# Altium PCB ADCSHubV2.PcbDoc
Units mil, origin at the board's own origin, x right, y up, seen from the top; angles counter-clockwise.
Board outline 3625 x 3400 mil, 2 copper layers (Component Side, Bottom Layer), stack 65.756 mil thick; 36 components, 35 nets, 272 pads, 53 vias.
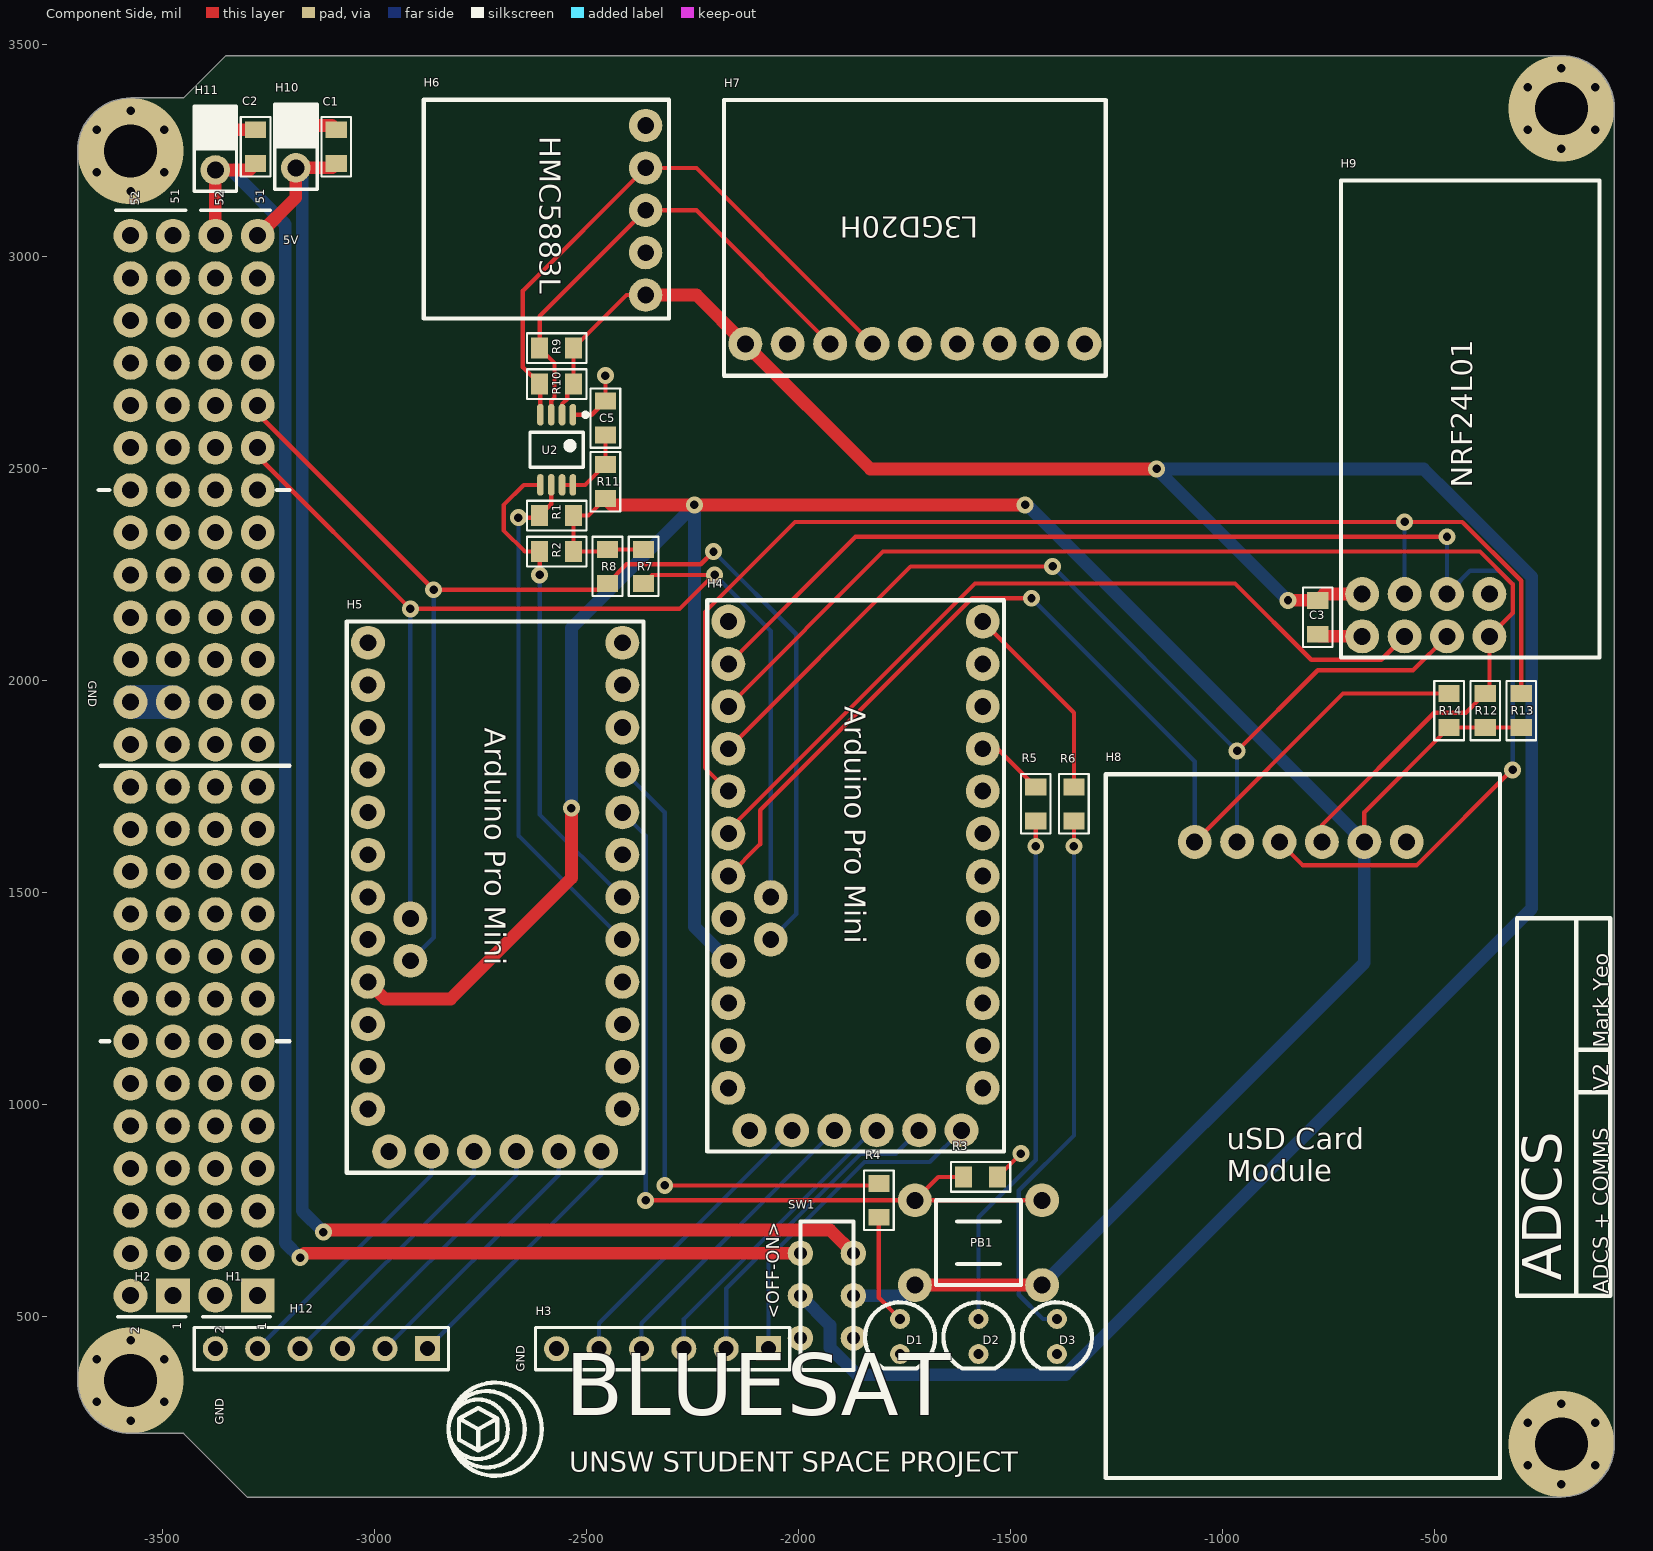
[diagram p0: Component Side view]
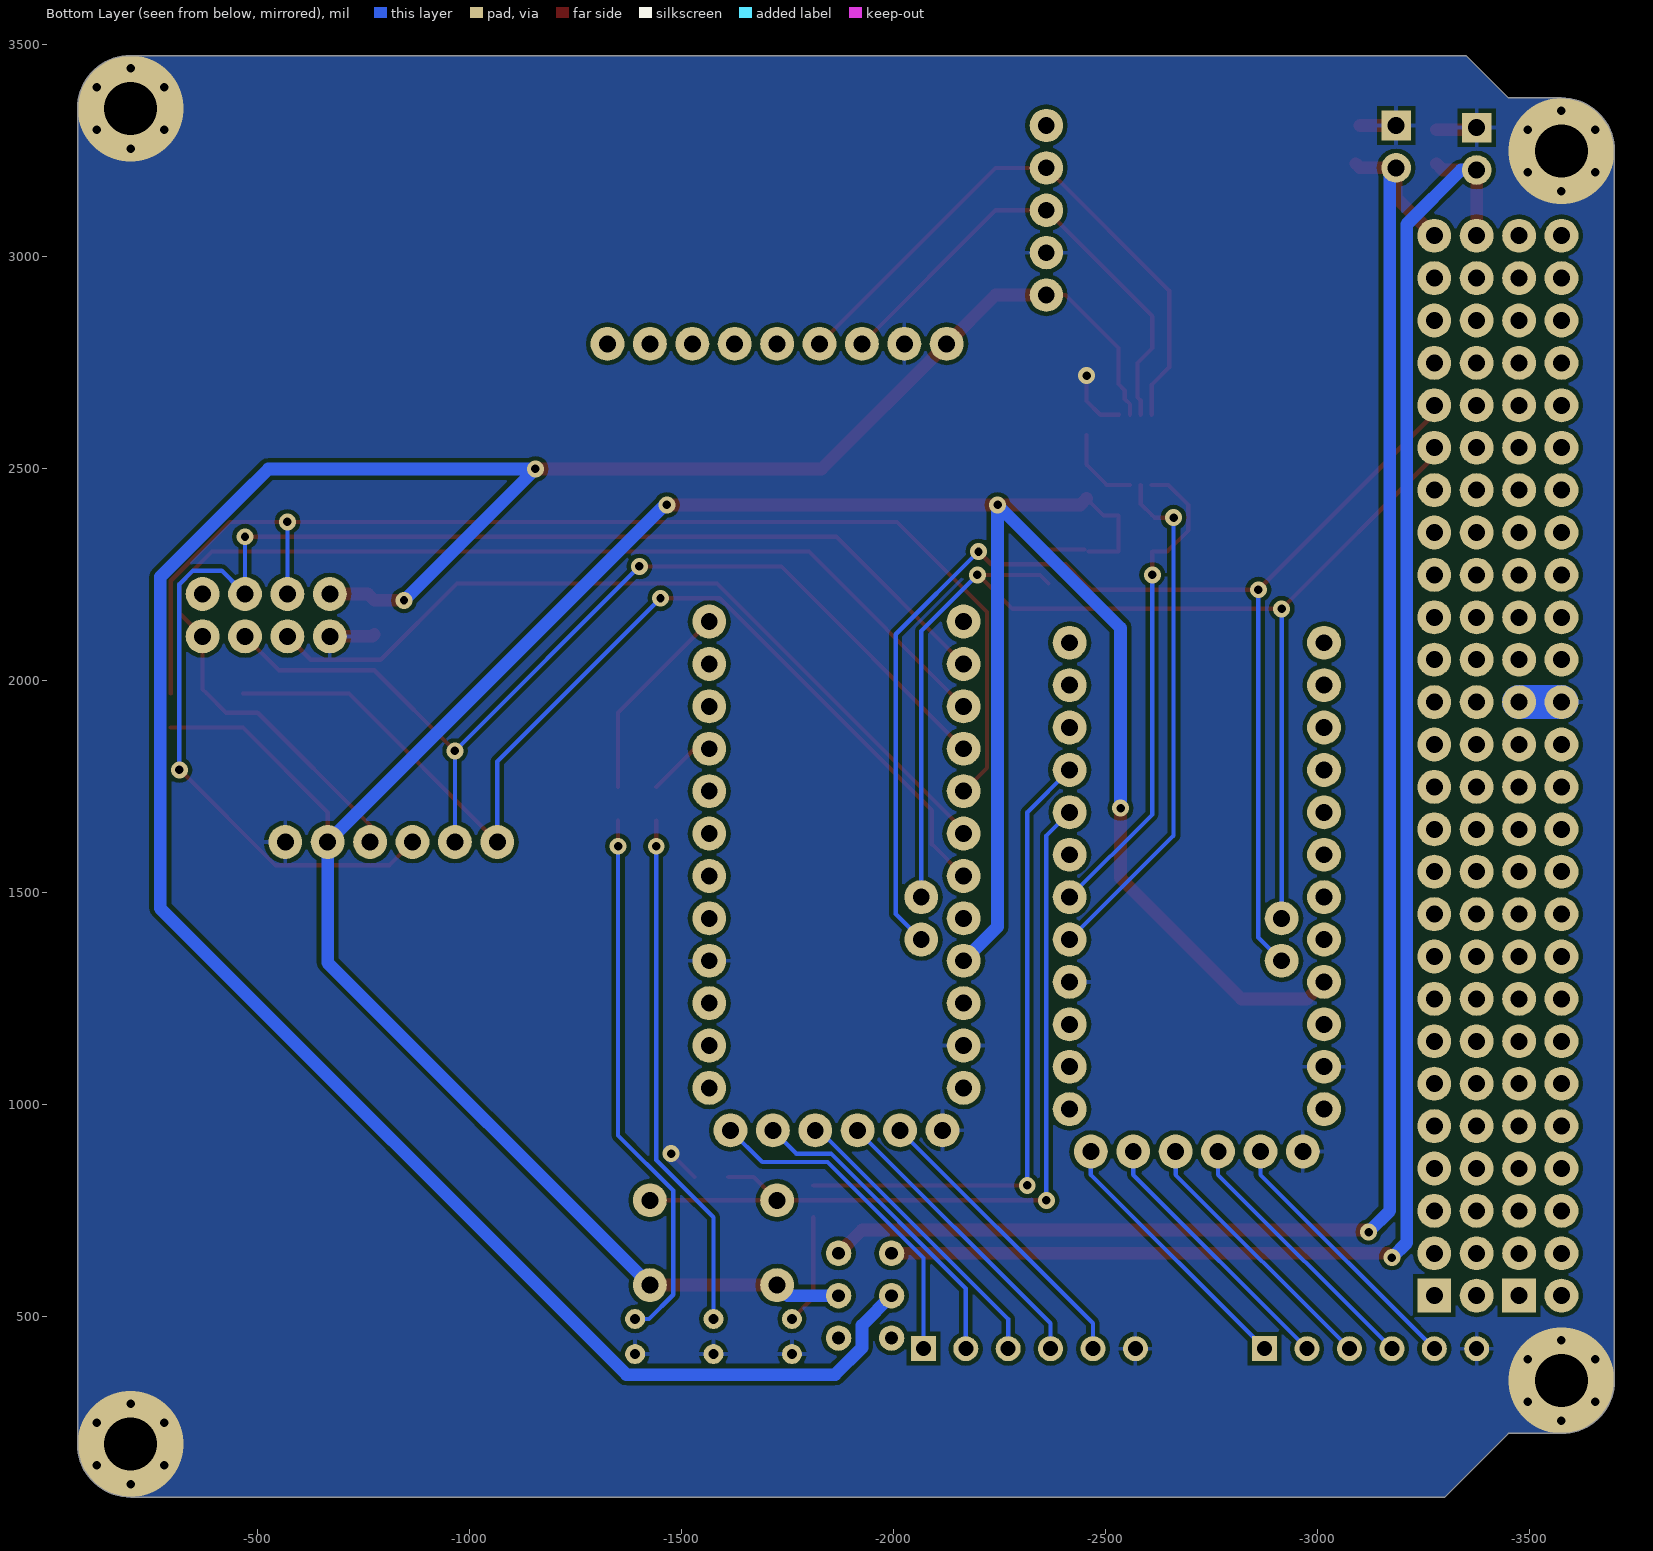
[diagram p1: Bottom Layer view, seen from below]

## Layer stack, top to bottom
Top Solder: solder mask 0.394, Solder Resist, Dk 3.5
Component Side: signal copper 1.378
Dielectric 1: core 63, FR-4, Dk 4.2
Bottom Layer: signal copper 1.378
Solder Side: solder mask 0.394, Solder Resist, Dk 3.5

## Board outline
-3575,225 cw(c-3575,350) -3700,350 -3700,3250 cw(c-3575,3250) -3575,3375 -3450,3375 -3350,3475 -200,3475 cw(c-200,3350) -75,3350 -75,200 cw(c-200,200) -200,75 -3300,75 -3450,225

## Design rules (kind name [scope] priority, off if disabled: settings)
Clearance [All] p1: gap=10
Clearance "Clearance (Same Net)" [All] p2: gap=0 except(8: SMDPad-SMDPad SMDPad-THPad SMDPad-Via)
ComponentClearance [All] p1: gap=0 collisioncheckmode=3 verticalgap=0 showdistances=FALSE
HoleSize HoleSize_1 [All] p1: absolutevalues=TRUE maxlimit=100000 minlimit=24 maxpercent=80.000 minpercent=20.000
HoleSize [All] p2: absolutevalues=TRUE maxlimit=100 minlimit=1 maxpercent=80.000 minpercent=20.000
HoleToHoleClearance mdViaViaSameLayer [All] p1: gap=8 allowstackedmicrovias=TRUE
HoleToHoleClearance [All] p2: gap=10 allowstackedmicrovias=TRUE
PasteMaskExpansion mlMinCreamFrame [All] p1: expansion=0
PasteMaskExpansion [All] p2: expansion=0
PlaneConnect PlaneConnect_1 [All] p1: planeconnectstyle=Relief reliefexpansion=20 reliefentries=4 reliefconductorwidth=10 reliefairgap=10
PlaneConnect PlaneConnect_2 [IsVia AND InNet('GND')] p2: planeconnectstyle=Direct reliefexpansion=20 reliefentries=4 reliefconductorwidth=10 reliefairgap=10
PolygonConnect ThermalVias [IsVia] p1: connectstyle=Direct reliefconductorwidth=10 reliefentries=4 polygonreliefangle="90 Angle" airgapwidth=10
PolygonConnect [All] p2: connectstyle=Relief reliefconductorwidth=10 reliefentries=4 polygonreliefangle="90 Angle" airgapwidth=10
RoutingVias [All] p1: holewidth=20 width=40 viastyle="Through Hole" minholewidth=20 minwidth=40 maxholewidth=20 maxwidth=40
SilkToSilkClearance [All] p1 off: silktosilkclearance=10
SilkToSolderMaskClearance [IsPad] p1 off: minsilkscreentomaskgap=10 clearancetoexposedcopper=TRUE
SolderMaskExpansion mlMinStopFrame [All] p1: expansion=4
SolderMaskExpansion [All] p2: expansion=4
Width Width_1 [All] p1: maxlimit=100000 minlimit=6 preferedwidth=10
Width [All] p2: maxlimit=10 minlimit=8 preferedwidth=10
23 further rules are at their usual default settings.

## Components (designator, comment, footprint, x,y, rotation, side; value= is the part's Value field where it differs from the comment)
C1 "10uF" 0805C-TBD -3090,3230 r90 top
C2 "10uF" 0805C-TBD -3280,3230 r90 top
C3 "10uF" 0805C-GENERIC -775,2120 r90 top
C5 "10uF" 0805C-GENERIC -2455,2590 r90 top
D1 "LED" LED -1760,495 r0 top
D2 "LED" LED -1575,495 r0 top
D3 "LED" LED -1390,495 r0 top
H1 "26X2 Header" "26X2 Header" -3275,550 r90 top
H2 "26X2 Header" "26X2 Header" -3475,550 r90 top
H3 "Header 6" HDR1X6 -2070,425 r180 top
H4 "Arduino Pro Mini" "Arduino Pro Mini" -1565,1040 r180 top
H5 "Arduino Pro Mini" "Arduino Pro Mini" -2415,990 r180 top
H6 "HMC5883L" HMC5883L -2360,2910 r180 top
H7 "L3GD20H" L3GD20H -2125,2795 r90 top
H8 "uSD Card Module" "uSD Card Module" -1065,1620 r90 top
H9 "NRF24L01" NRF24L01 -670,2105 r90 top
H10 "HEADER-1X2" HEADER-1X2 -3185,3310 r0 top
H11 "HEADER-1X2" HEADER-1X2 -3375,3305 r0 top
H12 "Header 6" HDR1X6 -2875,425 r180 top
PB1 "PushButton" PushButton -1425,775 r180 top
R1 "4K7" 0805R-4K7 -2540,2390 r180 top
R2 "4K7" 0805R-4K7 -2540,2305 r180 top
R3 "4K7" 0805R-4K7 -1600,830 r0 top
R4 "150R" 0805R-150 -1810,805 r270 top
R5 "150R" 0805R-150 -1440,1740 r270 top
R6 "150R" 0805R-150 -1350,1740 r270 top
R7 "4K7" 0805R-4K7 -2365,2300 r270 top
R8 "4K7" 0805R-4K7 -2450,2300 r270 top
R9 "4K7" 0805R-4K7 -2540,2785 r180 top
R10 "4K7" 0805R-4K7 -2540,2700 r180 top
R11 "200K" 0805R-4K7 -2455,2500 r270 top
R12 "4K7" 0805R-4K7 -380,1900 r90 top
R13 "4K7" 0805R-4K7 -295,1900 r90 top
R14 "4K7" 0805R-4K7 -465,1900 r90 top
SW1 "DPDT Switch" "DPDT SWITCH" -1870,650 r270 top
U2 "PCA9306" "PCA9306 (DCT)" -2570,2545 r270 top

## Footprints (in the part's own frame and the unit in brackets; to place one, negate y for a bottom-side part, rotate by r counter-clockwise, add the part's x,y. Pads: shape width x height; smd on the part's side, far side on the other; paste and mask are expansions set on the pad)
"26X2 Header" [mil]
  rect 80x80 hole 40: 1(0,0)
  round 80 hole 40: 2(0,100) 3(100,0) 4(100,100) 5(200,0) 6(200,100) 7(300,0) 8(300,100) 9(400,0) 10(400,100) 11(500,0) 12(500,100) 13(600,0) 14(600,100) 15(700,0) 16(700,100) 17(800,0) 18(800,100) 19(900,0) 20(900,100) 21(1000,0) 22(1000,100) 23(1100,0) 24(1100,100) 25(1200,0) 26(1200,100) 27(1300,0) 28(1300,100) 29(1400,0) 30(1400,100) 31(1500,0) 32(1500,100) 33(1600,0) 34(1600,100) 35(1700,0) 36(1700,100) 37(1800,0) 38(1800,100) 39(1900,0) 40(1900,100) 41(2000,0) 42(2000,100) 43(2100,0) 44(2100,100) 45(2200,0) 46(2200,100) 47(2300,0) 48(2300,100) 49(2400,0) 50(2400,100) 51(2500,0) 52(2500,100)
  silkscreen extent -50,-30 2560,135, body extent -55,-47 2555,150, height 335
0805C-GENERIC [mil] "CAPACITOR 0805"
  rect 40x50 smd: 1(-10,0) 2(70,0)
  silkscreen extent -40,-35 100,35, body extent -11,-25 70,25, height 26
0805C-TBD [mil] "CAPACITOR 0805"
  rect 40x50 smd: 1(-10,0) 2(70,0)
  silkscreen extent -40,-35 100,35, body extent -11,-25 70,25, height 26
0805R-4K7 [mil] "RESISTOR 0805"
  rect 40x50 smd: 1(-10,0) 2(70,0)
  silkscreen extent -40,-35 100,35, body extent -11,-25 70,25, height 27
0805R-150 [mil] "RESISTOR 0805"
  rect 40x50 smd: 1(-10,0) 2(70,0)
  silkscreen extent -40,-35 100,35, body extent -11,-25 70,25, height 27
"Arduino Pro Mini" [mil]
  round 80 hole 40: 1(0,0) 2(0,-100) 3(0,-200) 4(0,-300) 5(0,-400) 6(0,-500) 7(0,-600) 8(0,-700) 9(0,-800) 10(0,-900) 11(0,-1000) 12(0,-1100) 13(600,0) 14(600,-100) 15(600,-200) 16(600,-300) 17(600,-400) 18(600,-500) 19(600,-600) 20(600,-700) 21(600,-800) 22(600,-900) 23(600,-1000) 24(600,-1100) 25(500,-350) 26(500,-450) 27(50,100) 28(150,100) 29(250,100) 30(350,100) 31(450,100) 32(550,100)
  silkscreen extent -50,-1150 650,150
"DPDT SWITCH" [mil]
  round 60 hole 30: 1(0,0) 2(100,0) 3(200,0) 4(0,-125) 5(100,-125) 6(200,-125)
  silkscreen extent -75,-125 275,0, body extent -75,-125 275,0, height 209
HDR1X6 [mm] "Connector; Header; 6 Position"
  rect 1.5x1.5 hole 0.9: 1(0,0)
  round 1.5 hole 0.9: 2(2.54,0) 3(5.08,0) 4(7.62,0) 5(10.16,0) 6(12.7,0)
  silkscreen extent -1.27,-1.27 13.97,1.27
HEADER-1X2 [mil]
  rect 70x70 hole 40: 1(0,0)
  round 70 hole 40: 2(0,-100)
  silkscreen extent -50,-150 50,50, body extent -50,-150 50,50, height 470
HMC5883L [mm]
  round 2 hole 1: 1(0,0) 2(0,-2.54) 3(0,-5.08) 4(0,-7.62) 5(0,-10.16)
  silkscreen extent -1.4,-11.7 13.3,1.4
L3GD20H [mil]
  round 80 hole 40: 1(0,0) 2(0,-100) 3(0,-200) 4(0,-300) 5(0,-400) 6(0,-500) 7(0,-600) 8(0,-700) 9(0,-800)
  silkscreen extent -75,-850 575,50
LED [mm]
  round 1.2 hole 0.6: 1(0,0) 2(0,-2.1)
  silkscreen extent -2.1,-2.96 2.1,1
NRF24L01 [mil]
  round 80 hole 40: 1(0,0) 2(0,-100) 3(0,-200) 4(0,-300) 5(100,-300) 6(100,-200) 7(100,-100) 8(100,0)
  silkscreen extent -50,-560 1075,50
"PCA9306 (DCT)" [mm] "Dual Bidirectional I2C Voltage Shifter"
  oval 1.3x0.4 smd: 1(-2.1,0.975) 2(-2.1,0.325) 3(-2.1,-0.325) 4(-2.1,-0.975) 5(2.1,-0.975) 6(2.1,-0.325) 7(2.1,0.325) 8(2.1,0.975)
  silkscreen extent -2.22,-1.6 1.05,1.85, body extent -2,-1.6 2,1.6, height 1.4
PushButton [mil]
  round 80 hole 40: 5(0,0) 6(300,0) 7(0,200) 8(300,200)
  silkscreen extent 50,0 250,200, body extent 50,0 250,200, height 300
"uSD Card Module" [mil]
  round 80 hole 40: 1(0,0) 2(0,-100) 3(0,-200) 4(0,-300) 5(0,-400) 6(0,-500)
  silkscreen extent -1500,-720 160,210

## Part data
C1 C2: library part 0805C-100nF-25V-X7R-MUR, "CAPACITOR 0805 CERAMIC"
C3 C5: library part 0805C-10UF-16V-X5R-TDK, "CAPACITOR 0805 CERAMIC"
D1 D2 D3: "Small LED"
H3 H12: "Header, 6-Pin"
H6: "Magnetometer"
H7: "Gyroscope"
H9: "Radio Transceiver"
R1 R2 R3 R7 R8 R9 R10 R11 R12 R13 R14: library part 0805R-4K7, "RESISTOR 0805 1/4 WATT THIN FILM"
R4 R5 R6: library part 0805R-150, "RESISTOR 0805 1/4 WATT THIN FILM"
U2: "Dual Bidirectional I2C Voltage Level Translator"

## Via types
v1: diameter 40, hole 20, Component Side to Bottom Layer, 49 vias
v2: diameter 250, hole 125, Component Side to Bottom Layer, 4 vias

## Nets (pads, with @x,y where several pads share a name; then routed paths per layer and width w, separated by ;. In a path a pad name is that pad's centre, name@x,y a point inside that pad or via, vN(x,y) a via of type N, cw(c..) or ccw(c..) an arc to the next point about the centre after c; other vN are vias at no path point)
3V3: C3.2 H6.1 H7.1 H9.8 R9.1 R10.1 SW1.5 U2.2 | length 6445.5
  Component Side w10: U2.2 -2557.2,2652.8 -2545,2665 -2545,2685 R10.1 R9.1 -2405,2910 H6.1
  Component Side w30: H6.1 -2240,2910 H7.1 -1830,2500 v1(-1155,2500) ; v1(-845,2190) C3.2 -760,2205 H9.8
  Bottom Layer w30: SW1.5 -1925,480 -1925,427.22 -1861.48,363.7 -1369.86,363.7 -270,1463.56 -270,2245 -460,2435 -525,2500 v1(-1155,2500) v1(-845,2190)
3V3_IN: C2.1 H1.52 H11.2 SW1.4 | length 4109.8
  Component Side w30: H1.52 H11.2 -3295,3205 C2.1 ; v1(-3175,640) -3165,650 SW1.4
  Bottom Layer w30: H11.2 -3338.08,3205 -3210,3076.92 -3210,675 v1(-3175,640)
5V_IN: C1.1 H1.51 H10.2 SW1.1 | length 4108.2
  Component Side w30: H1.51 -3185,3140 H10.2 -3100,3210 C1.1 ; v1(-3120,700) -3115,705 -1925,705 SW1.1
  Bottom Layer w30: H10.2 -3170,3195 -3170,750 v1(-3120,700)
CE_NRF: H4.19 H9.2 | length 1941.6
  Component Side w10: H4.19 -2165,1648.28 -1583.28,2230 -970,2230 -790,2050 -625,2050 H9.2
CS_NRF: H4.20 H9.7 R13.2 | length 2952.1
  Component Side w10: H4.20 -2220,1795 -2220,2162.78 -2007.78,2375 v1(-570,2375) -433.93,2375 -295,2236.07 R13.2
  Bottom Layer w10: H9.7 v1(-570,2375)
CS_SD: H4.18 H8.1 R14.2 | length 2512.6
  Component Side w10: H4.18 -2090,1615 -2090,1695 -1590,2195 v1(-1450,2195) ; H8.1 -715,1970 R14.2
  Bottom Layer w10: v1(-1450,2195) -1065,1810 H8.1
GND: C1.2 C2.2 C3.1 C5.2 D1.2 D2.2 D3.2 H2.29 H2.30 H3.6 H4.4 H4.14 H4.32 H5.4 H5.14 H5.32 H6.2 H7.2 H8.6 H9.1 H10.1 H11.1 H12.6 R3.2 U2.1 | length 616.9
  Component Side w10: U2.1 -2487.32,2627.68 C5.2 v1(-2455,2720) ; R3.2 v1(-1475,885)
  Component Side w30: H11.1 -3370,3300 C2.2 ; H10.1 C1.2@-3100,3310 ; C3.1 -770,2105 H9.1
  Bottom Layer w80: H2.30 H2.29
  other v1: -200,105 -280,150 -120,150 -280,250 -120,250 -3575,255 -200,295 -3655,300 -3495,300 -3655,400 -3495,400 -3575,445 -3575,3155 -3655,3200 -3495,3200 -200,3255 -3655,3300 -3495,3300 -280,3300 -120,3300 -3575,3345 -280,3400 -120,3400 -200,3445
  other v2: -200,200 -3575,350 -3575,3250 -200,3350
LED_B: H4.12 R6.1 | length 479.1
  Component Side w10: H4.12 -1350,1925 R6.1
LED_G: H4.9 R5.1 | length 162.3
  Component Side w10: H4.9 -1530,1840 R5.1
LED_Y: H5.9 R4.1 | length 1526.4
  Component Side w10: v1(-2315,810) R4.1@-1810,810
  Bottom Layer w10: H5.9 -2315,1690 v1(-2315,810)
MISO: H4.22 H8.4 H9.4 R12.2 | length 2871.3
  Component Side w10: H4.22 -1800,2305 -392.22,2305 -315,2227.78 -315,2160 H9.4 -370,1980 R12.2 -425,1925 -500,1925 -765,1660 H8.4
MOSI: H4.23 H8.3 H9.6 | length 3242
  Component Side w10: H4.23 -1865,2340 v1(-470,2340) ; H8.3 -810,1565 -542.22,1565 v1@-315,1792.22
  Bottom Layer w10: H9.6 H9.6@-460,2215 ; v1(-470,2340) -470,2225 H9.6@-460,2215 ; v1@-315,1792.22 -315,2227.78 -347.22,2260 -415,2260 H9.6@-460,2215
  other v1: -315,1790
NetC5_1: C5.1 R11.1 U2.7 U2.8 | length 192
  Component Side w10: U2.7 U2.8 -2502.68,2462.32 R11.1 C5.1
NetD1_1: D1.1 R4.2 | length 260.7
  Component Side w10: R4.2 -1810,545 D1.1
NetD2_1: D2.1 R5.2 | length 1230.9
  Component Side w10: v1(-1440,1610) R5.2
  Bottom Layer w10: D2.1 -1575,735 -1440,870 v1(-1440,1610)
NetD3_1: D3.1 R6.2 | length 1285.3
  Component Side w10: v1(-1350,1610) R6.2
  Bottom Layer w10: D3.1 -1422.78,495 -1480,552.22 -1480,797.78 -1350,927.78 v1(-1350,1610)
NetH3_1: H3.1 H4.27 | length 793.5
  Bottom Layer w10: H3.1 -2070,638.64 -1843.64,865 -1690,865 H4.27
NetH3_2: H3.2 H4.28 | length 751.5
  Bottom Layer w10: H3.2 -2170,566.92 -1851.92,885 -1770,885 H4.28
NetH3_3: H3.3 H4.29 | length 709.4
  Bottom Layer w10: H3.3 -2270,495.21 -1825.21,940 H4.29
NetH3_4: H3.4 H4.30 | length 703.5
  Bottom Layer w10: H3.4 -2370,485 H4.30
NetH3_5: H3.5 H4.31 | length 703.5
  Bottom Layer w10: H3.5 -2470,485 H4.31
NetH5_27: H5.27 H12.1 | length 634.8
  Bottom Layer w10: H12.1 -2465,835 H5.27
NetH5_28: H5.28 H12.2 | length 634.8
  Bottom Layer w10: H12.2 -2565,835 H5.28
NetH5_29: H5.29 H12.3 | length 634.8
  Bottom Layer w10: H12.3 -2665,835 H5.29
NetH5_30: H5.30 H12.4 | length 634.8
  Bottom Layer w10: H12.4 -2765,835 H5.30
NetH5_31: H5.31 H12.5 | length 644.8
  Component Side w10: H12.5 H12.5@-3265,425
  Bottom Layer w10: H12.5 -2865,835 H5.31
PUSH_BUTTON: H5.8 PB1.5 PB1.6 R3.1 | length 2010.6
  Component Side w10: v1(-2360,775) PB1.6 ; R3.1 -1670,830 PB1.6 ; PB1.5 PB1.6
  Bottom Layer w10: H5.8 -2360,1635 v1(-2360,775)
SCK: H4.21 H8.2 H9.3 | length 2400.1
  Component Side w10: H4.21 -1735,2270 v1(-1400,2270) ; v1(-965,1835) -775,2025 -550,2025 H9.3 H9.3@-480,2105
  Bottom Layer w10: v1(-1400,2270) v1(-965,1835) H8.2 H8.2@-955,1620
SCL_3V3: H6.3 H7.3 R9.2 U2.3 | length 1169.1
  Component Side w10: U2.3 -2582.8,2660.99 -2575,2668.79 -2575,2750 R9.2 -2610,2860 H6.3 -2240,3110 H7.3
SCL_5V: H5.5 R1.2 U2.6 | length 1232.1
  Component Side w10: v1(-2660,2385) -2615,2385 R1.2 -2582.8,2417.2 U2.6
  Bottom Layer w10: v1(-2660,2385) -2660,1635 H5.5
SCL_EXT: H1.43 H4.25 H5.25 R8.2 | length 3222.6
  Component Side w10: H1.43@-3275,2630 v1(-2860,2215) -2465,2215 R8.2 -2405,2275 -2230,2275 v1(-2200,2305)
  Bottom Layer w10: H1.43@-3275,2630 H1.43 ; H5.25 -2860,1395 v1(-2860,2215) ; v1(-2200,2305) -2005,2110 -2005,1450 H4.25
SDA_3V3: H6.4 H7.4 R10.2 U2.4 | length 1426.6
  Component Side w10: U2.4 -2608.39,2698.39 R10.2 -2650,2740 -2650,2920 H6.4 -2240,3210 H7.4
SDA_5V: H5.6 R2.2 U2.5 | length 1167.7
  Component Side w10: v1(-2610,2250) R2.2 -2645,2305 -2695,2355 -2695,2415 -2647.68,2462.32 U2.5
  Bottom Layer w10: v1(-2610,2250) -2610,1685 H5.6
SDA_EXT: H1.41 H4.26 H5.26 R7.2 | length 2998.1
  Component Side w10: H1.41@-3275,2530 v1(-2915,2170) -2280,2170 v1@-2200,2250 ; R7.2 -2345,2250 v1@-2200,2250 ; v1(-2197.22,2250) v1@-2200,2250
  Bottom Layer w10: H1.41@-3275,2530 H1.41 ; H5.26 v1(-2915,2170) ; v1(-2197.22,2250) -2065,2117.78 H4.26
VCC: H4.16 H5.16 H8.5 PB1.7 PB1.8 R1.1 R2.1 R7.1 R8.1 R11.2 R12.1 R13.1 R14.1 SW1.2 | length 7513
  Component Side w10: R8.1@-2460,2305 R2.1 R1.1 -2495,2390 R11.2 ; R8.1 -2405,2310 R7.1 ; H8.5 -665,1690 R14.1 R12.1 R13.1
  Component Side w30: H5.16 -2975,1250 -2820,1250 -2535,1535 v1(-2535,1700) ; R11.2 -2440,2415 v1(-2245,2415) v1(-1465,2415) ; PB1.8 PB1.7
  Bottom Layer w30: v1(-2535,1700) -2535,2125 v1(-2245,2415) -2245,1420 H4.16 ; SW1.2 -1750,550 PB1.8 ; v1@-1460,2415 H8.5 -665,1335 PB1.7
pads on no net: H1.1 H1.2 H1.3 H1.4 H1.5 H1.6 H1.7 H1.8 H1.9 H1.10 H1.11 H1.12 H1.13 H1.14 H1.15 H1.16 H1.17 H1.18 H1.19 H1.20 H1.21 H1.22 H1.23 H1.24 H1.25 H1.26 H1.27 H1.28 H1.29 H1.30 H1.31 H1.32 H1.33 H1.34 H1.35 H1.36 H1.37 H1.38 H1.39 H1.40 H1.42 H1.44 H1.45 H1.46 H1.47 H1.48 H1.49 H1.50 H2.1 H2.2 H2.3 H2.4 H2.5 H2.6 H2.7 H2.8 H2.9 H2.10 H2.11 H2.12 H2.13 H2.14 H2.15 H2.16 H2.17 H2.18 H2.19 H2.20 H2.21 H2.22 H2.23 H2.24 H2.25 H2.26 H2.27 H2.28 H2.31 H2.32 H2.33 H2.34 H2.35 H2.36 H2.37 H2.38 H2.39 H2.40 H2.41 H2.42 H2.43 H2.44 H2.45 H2.46 H2.47 H2.48 H2.49 H2.50 H2.51 H2.52 H4.1 H4.2 H4.3 H4.5 H4.6 H4.7 H4.8 H4.10 H4.11 H4.13 H4.15 H4.17 H4.24 H5.1 H5.2 H5.3 H5.7 H5.10 H5.11 H5.12 H5.13 H5.15 H5.17 H5.18 H5.19 H5.20 H5.21 H5.22 H5.23 H5.24 H6.5 H7.5 H7.6 H7.7 H7.8 H7.9 H9.5 SW1.3 SW1.6

## Polygon pours and split planes (outlines as drawn)
GND on Bottom Layer "Bottom Layer-GND" (solid, pour order 7): -3575,225 cw(c-3575,350) -3700,350 -3700,3250 cw(c-3575,3250) -3575,3375 -3450,3375 -3350,3475 -200,3475 cw(c-200,3350) -75,3350 -75,200 cw(c-200,200) -200,75 -3300,75 -3450,225

## Silkscreen, mask and mechanical layers (free items; w line width, h text height)
Top Overlay:
  circle w10: c-2755,235 r70
  circle w10: c-2735,235 r90
  circle w10: c-2715,235 r110
  lines w10: -3650,2450 -3625,2450 ; -3645,1150 -3625,1150 ; -3645,1800 -3200,1800 ; -3230,1150 -3200,1150 ; -3230,2450 -3200,2450 ; -165,550 -165,1440 ; -165,1030 -85,1030 ; -165,1130 -85,1130 ; -2800,260 -2755,235 ; -2800,260 -2800,210 -2755,185 ; -2800,260 -2755,285 -2710,260 ; -2755,185 -2755,235 ; -2755,185 -2710,210 -2710,260 ; -2755,235 -2710,260 ; -305,550 -305,1440 -85,1440 -85,550 -305,550
  text "5V" at -3215,3030 h20
  text "GND" at -3675,2000 h20 r270
  text "Mark Yeo" at -90,1135 h35 r90
  text "V2" at -90,1035 h35 r90
  text "ADCS" at -170,585 h157.48 r90
  text "ADCS + COMMS" at -90,555 h35 r90
  text "<OFF-ON>" at -2045,495 h30 r90
  text "GND" at -2645,370 h20 r90
  text "GND" at -3355,245 h20 r90
  text "BLUESAT" at -2550,220 h250
  text "UNSW STUDENT SPACE PROJECT" at -2540,135 h47.24
Mechanical 13:
  lines w10: -3700,350 ccw(c-3575,350) -3575,225 -3500,225 -3450,225 -3300,75 -200,75 ccw(c-200,200) -75,200 -75,3350 ccw(c-200,3350) -200,3475 -3350,3475 -3450,3375 -3500,3375 -3575,3375 ccw(c-3575,3250) -3700,3250 -3700,350

## Text inside footprints (layer, text, board x,y; h text height)
H1: Top Overlay "2" at -3355,460.16 h20 r90; Top Overlay "1" at -3255,470.16 h20 r90; Top Overlay "52" at -3355,3120.16 h20 r90; Top Overlay "51" at -3260,3125.16 h20 r90
H2: Top Overlay "2" at -3555,460.16 h20 r90; Top Overlay "1" at -3455,470.16 h20 r90; Top Overlay "52" at -3555,3120.16 h20 r90; Top Overlay "51" at -3460,3125.16 h20 r90
H8: Top Overlay "uSD Card / Module" at -990,820 h50